# Altium PCB MP1584.PcbDoc
Units mil, origin at the board's own origin, x right, y up, seen from the top; angles counter-clockwise.
Board outline 948.82 x 673.23 mil, 2 copper layers (Top, Bottom), stack 2.8 mil thick; 28 components, 10 nets, 51 pads, 33 vias.
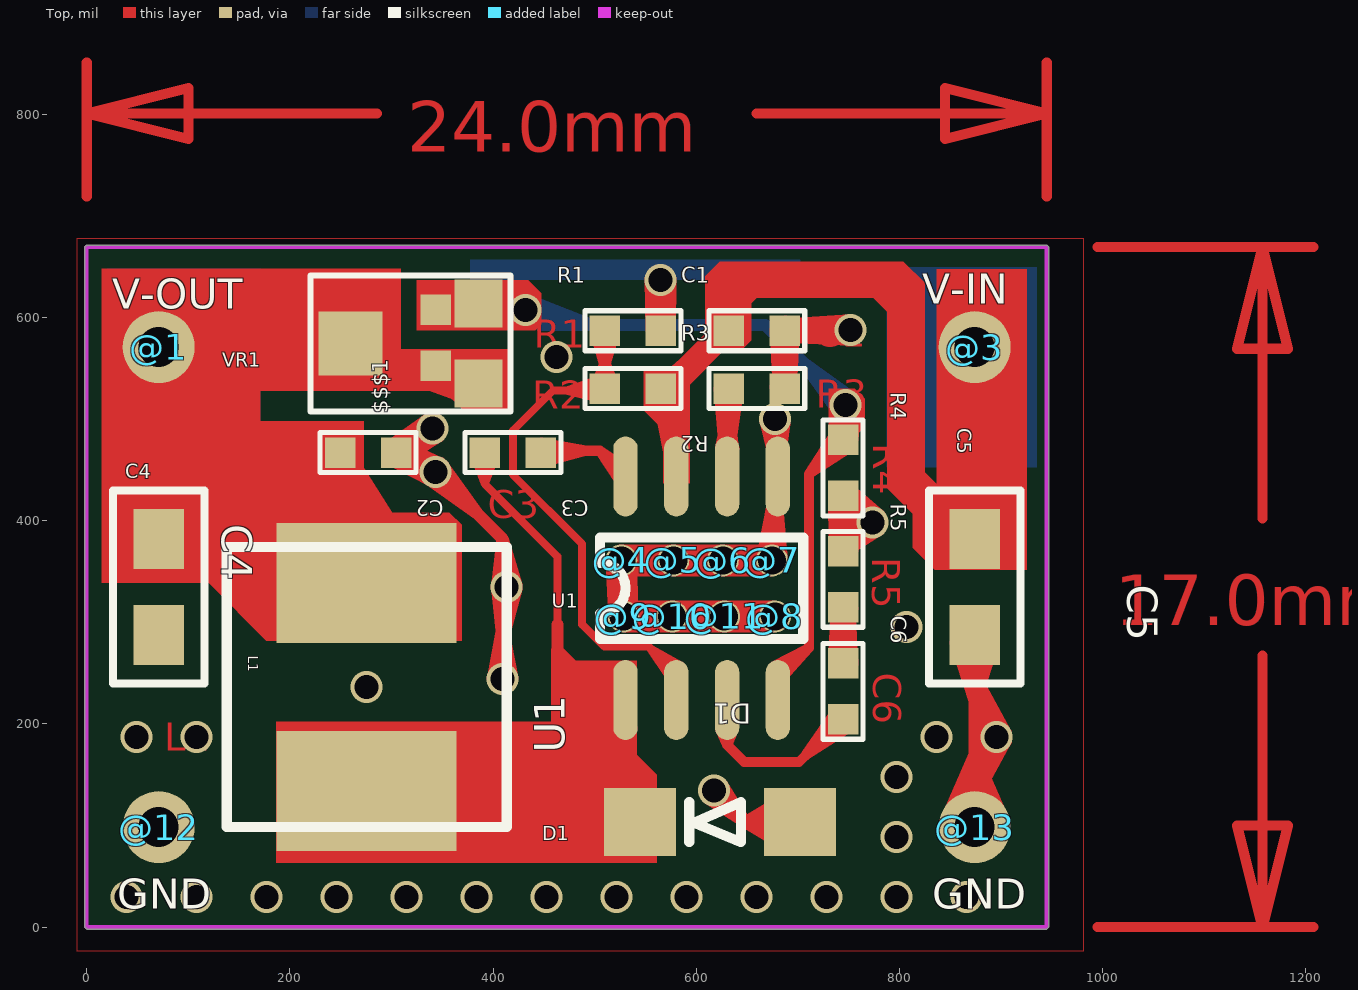
[diagram p0: Top view]
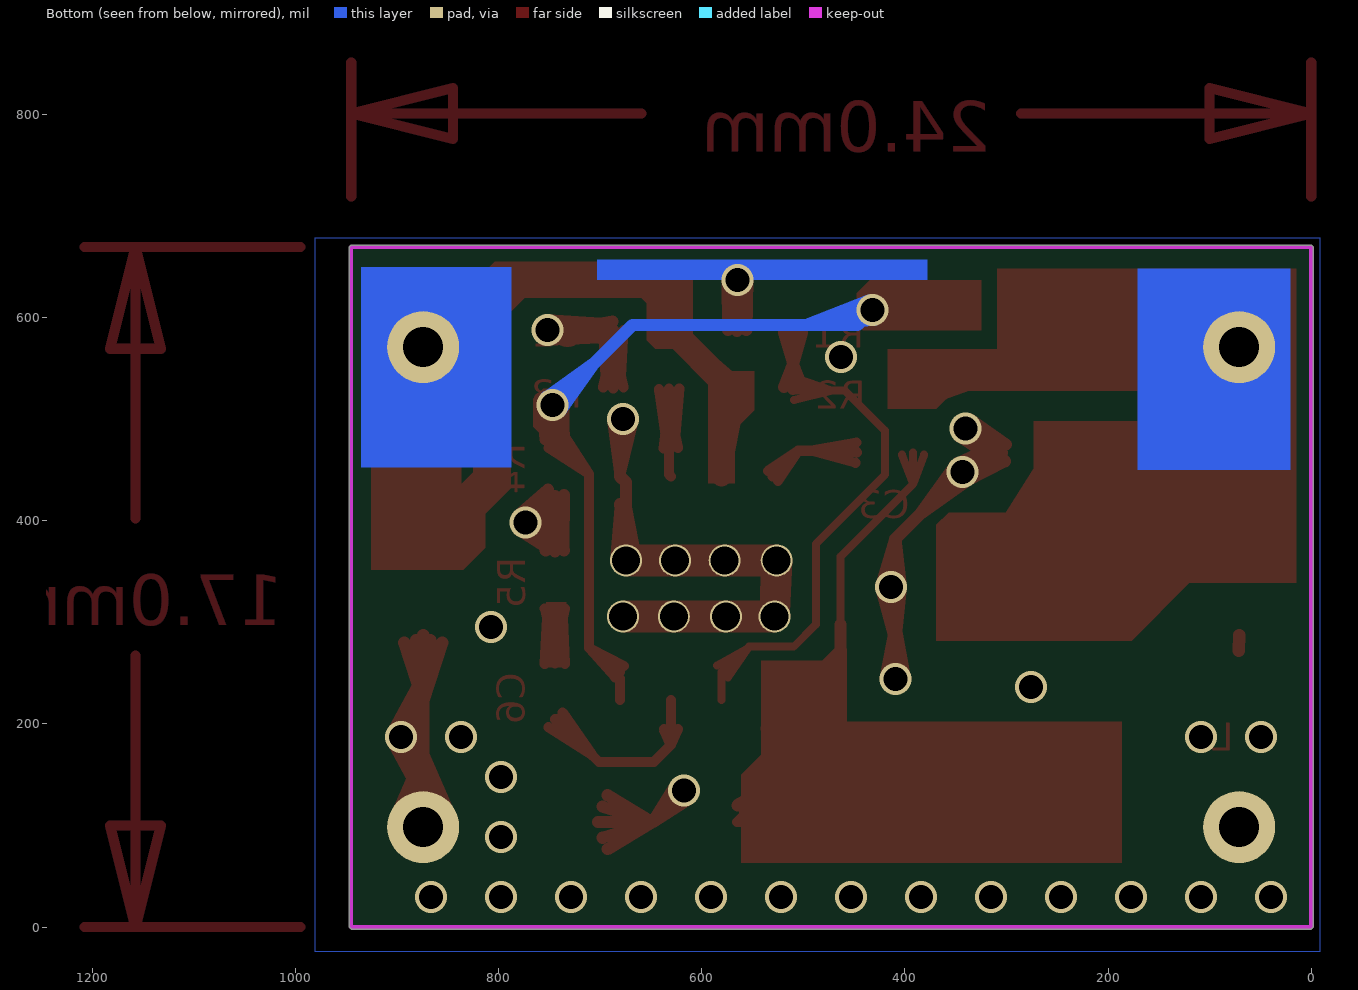
[diagram p1: Bottom view, seen from below]

## Layer stack, top to bottom
Top: signal copper 1.4
Bottom: signal copper 1.4

## Board outline
-1.97,0 0,-1.97 944.88,-1.97 946.85,0 946.85,669.29 944.88,671.26 0,671.26 -1.97,669.29

## Design rules (kind name [scope] priority, off if disabled: settings)
Clearance "'Default' PADS rule_18" [All] p1: gap=12
Clearance "'Default' PADS rule_15" [IsVia vs IsVia] p2: gap=7.87
ComponentClearance "'Default' PADS rule_12" [All] p1: gap=10 collisioncheckmode=3 verticalgap=10 showdistances=FALSE
FlightTimeFalling "'Default' PADS rule_10" [All] p1: maximum=10.00
FlightTimeRising "'Default' PADS rule_9" [All] p1: maximum=10.00
Length "'Default' PADS rule_5" [All] p1: maxlimit=50000 minlimit=0
MatchedLengths "'Default' PADS rule_11" [InNetClass('All Nets')] p1: tolerance=200 checknetsindiffpair=TRUE checkdiffpairvsdiffpair=TRUE checkothers=TRUE
MaxMinImpedance "'Default' PADS rule_8" [All] p1: minimum=50.00 maximum=150.0
ParallelSegment "'Default' PADS rule_7" [All] p1: limit=1000 gap=200
ParallelSegment "'Default' PADS rule_6" [All] p2: limit=1000 gap=200
PlaneClearance "'Default' PADS rule_14" [All] p1: clearance=12
PlaneConnect "Power Plane Connect Style - from global settings" [All] p1: planeconnectstyle=Relief reliefexpansion=20 reliefentries=2 reliefconductorwidth=19.69 reliefairgap=10
PolygonConnect [All] p1: connectstyle=Relief reliefconductorwidth=10 reliefentries=4 polygonreliefangle="90 Angle"
RoutingLayers "'Default' PADS rule_3" [All] p1: top layer_v5=TRUE bottom layer_v5=TRUE
RoutingPriority "'Default' PADS rule_2" [All] p1: routingpriority=0
RoutingTopology "'Default' PADS rule" [All] p1: topology=Shortest
RoutingVias "'Default' PADS rule_4" [All] p1: holewidth=23.62 width=31.5 viastyle="Through Hole" minholewidth=23.62 minwidth=31.5 maxholewidth=23.62 maxwidth=31.5
SMDToCorner "'Default' PADS rule_16" [All] p1: distance=78700
SMDToPlane "'Default' PADS rule_17" [All] p1: distance=78700
SilkscreenOverComponentPads [All] p1: minsilkscreentomaskgap=10
SolderMaskExpansion "Solder Mask Expansion from CAM settings" [All] p1: expansion=5
Width "'Default' PADS rule_13" [All] p1: maxlimit=196.85 minlimit=7.87 preferedwidth=12
21 further rules are at their usual default settings.

## Components (designator, comment, footprint, x,y, rotation, side; value= is the part's Value field where it differs from the comment)
$$$1 "0603/10" 0603/10 343.31,552.61 r90 top
@1 "FPAD_7" FPAD_7 70.87,570.87 r0 top
@3 "FPAD_7" FPAD_7 874.02,570.87 r0 top
@4 "FPAD_4" FPAD_4 526.1,360.91 r180 top
@5 "FPAD_4" FPAD_4 577.35,360.91 r180 top
@6 "FPAD_4" FPAD_4 626.1,360.91 r180 top
@7 "FPAD_4" FPAD_4 674.43,360.91 r180 top
@8 "FPAD_4" FPAD_4 677.35,305.73 r180 top
@9 "FPAD_4" FPAD_4 528.18,305.73 r180 top
@10 "FPAD_4" FPAD_4 576.1,305.73 r180 top
@11 "FPAD_4" FPAD_4 627.35,305.73 r180 top
@12 "FPAD_7" FPAD_7 70.87,98.43 r0 top
@13 "FPAD_7" FPAD_7 874.02,98.43 r0 top
C1 "0603A" 0603A 631.97,586.98 r0 top
C2 "0603A" 0603A 304.43,466.98 r180 top
C3 "0603A" 0603A 446.93,466.98 r180 top
C4 "0805-1A" 0805-1A 70.87,334.65 r270 top
C5 "0805-1A" 0805-1A 874.02,334.65 r270 top
C6 "0603A" 0603A 744.43,259.57 r270 top
D1 "DIODE-SMA/DO-214AC-M4" DIODE-SMA/DO-214AC-M4 623.18,103.31 r180 top
L1 "DIODE-SMA/DO-214AC-M4BAA" DIODE-SMA/DO-214AC-M4BAA 275.59,236.25 r270 top
R1 "0603A" 0603A 510.04,586.98 r0 top
R2 "0603A" 0603A 565.04,529.97 r180 top
R3 "0603A" 0603A 631.97,529.97 r0 top
R4 "0603A" 0603A 744.43,479.48 r270 top
R5 "0603A" 0603A 744.43,369.8 r270 top
U1 "SO-8" SO-8 530.27,223.64 r90 top
VR1 "R3X3AA" R3X3AA 322.52,574.38 r90 top

## Footprints (in the part's own frame and the unit in brackets; to place one, negate y for a bottom-side part, rotate by r counter-clockwise, add the part's x,y. Pads: shape width x height; smd on the part's side, far side on the other; paste and mask are expansions set on the pad)
0603/10 [mil]
  rect 30x30 smd: 1(0,0) 2(55,0)
0603A [mil]
  rect 30x30 smd: 23(0,0) 24(55,0)
  silkscreen extent -20,-20 75,20
0805-1A [mm]
  rect 1.5x1.27 smd: 1(-1.2,0) 2(1.2,0)
  silkscreen extent -2.41,-1.14 2.41,1.14
DIODE-SMA/DO-214AC-M4 [mm]
  rect 1.8x1.7 smd: 1(-2,0) 2(2,0)
  silkscreen extent -0.52,-0.5 0.77,0.5
DIODE-SMA/DO-214AC-M4BAA [mm]
  rect 3x4.5 smd: 1(-2.6,0) 2(2.6,0)
  silkscreen extent -3.5,-3.5 3.5,3.5
FPAD_4 [mm]
  round 0.8 hole 0.7: 1(0,0)
FPAD_7 [mm]
  round 1.8 hole 1: 1(0,0)
R3X3AA [mm]
  rect 1.2x1.2 smd: B1(-1,-1.6) E2(1,-1.6)
  rect 1.6x1.6 smd: C3(0,1.6)
  silkscreen extent -1.7,-2.4 1.7,2.6
SO-8 [mil]
  oval 78.74x24 smd: 1(0,0) 2(0,-50) 3(0,-100) 4(0,-150) 5(220,-150) 6(220,-100) 7(220,-50) 8(220,0)
  silkscreen extent 60,-175 160,25

## Via types
v1: diameter 31.5, hole 23.62, Top to Bottom, 33 vias

## Nets (pads, with @x,y where several pads share a name; then routed paths per layer and width w, separated by ;. In a path a pad name is that pad's centre, name@x,y a point inside that pad or via, vN(x,y) a via of type N, cw(c..) or ccw(c..) an arc to the next point about the centre after c; other vN are vias at no path point)
5V: $$$1.1 @1.1 C2.24 C4.1 L1.1 VR1.B1 VR1.C3 | length 6125.8
  Top w10: VR1.C3@248.03,550.51 310.71,535.01 ; VR1.C3@251.23,560.12 310.71,535.01 ; VR1.C3@255.84,569.04 310.71,535.01 ; VR1.C3@263.75,579.32 310.71,535.01 ; VR1.C3@271.18,586.06 310.71,535.01 ; VR1.C3@279.65,591.62 310.71,535.01 ; $$$1.1@337.26,544.65 VR1.B1@382.28,516.67 ; $$$1.1@337.42,560.68 310.71,535.01 ; $$$1.1@338.87,543.65 VR1.B1@384.82,526.41 ; $$$1.1@342.36,542.65 VR1.B1@384.82,543.6 ; $$$1.1@344.41,562.55 VR1.B1@382.28,553.35 ; $$$1.1@344.78,542.71 VR1.B1@382.28,553.35 ; $$$1.1@346.57,562.06 VR1.B1@384.82,543.6 ; $$$1.1@346.83,543.25 310.71,535.01 ; $$$1.1@349.48,560.48 VR1.B1@384.82,526.41 ; $$$1.1@350.75,559.28 VR1.B1@382.28,516.67 ; 310.71,535.01 VR1.B1 ; 310.71,535.01 271.34,574.38 VR1.C3 310.71,535.01 ; 310.71,535.01 $$$1.1 ; 331.89,535.01 VR1.B1@382.28,516.67 ; 331.89,535.01 VR1.B1@382.28,553.35 ; 331.89,535.01 VR1.B1@384.82,526.41 ; 331.89,535.01 VR1.B1@384.82,543.6 ; 331.89,535.01 VR1.B1 ; 331.89,535.01 $$$1.1@350.16,545.32 ; 331.89,535.01 $$$1.1@333.87,555.89 ; 331.89,535.01 $$$1.1 ; 331.89,535.01 $$$1.1@350.16,545.32 ; 331.89,535.01 $$$1.1@333.87,555.89 ; 331.89,535.01 $$$1.1 ; 331.89,535.01 $$$1.1@350.16,545.32 ; 331.89,535.01 $$$1.1@333.87,555.89 ; 331.89,535.01 $$$1.1 ; 331.89,535.01 $$$1.1@350.16,545.32 ; 331.89,535.01 $$$1.1@333.87,555.89 ; 331.89,535.01 $$$1.1 ; 331.89,535.01 $$$1.1@350.16,545.32 ; 331.89,535.01 $$$1.1@333.87,555.89 ; 331.89,535.01 $$$1.1 ; $$$1.1 VR1.B1 ; $$$1.1 VR1.B1@382.28,516.67 ; $$$1.1 VR1.B1@384.82,526.41 ; $$$1.1 VR1.B1 ; $$$1.1 VR1.B1@382.28,553.35 ; $$$1.1 VR1.B1@384.82,543.6 ; VR1.B1 348.15,561.36 VR1.B1 ; VR1.B1 340.5,543.01 VR1.B1
  Top w12: 42.06,564.8 70.87,499.43 ; C4.1@52.1,389.38 70.87,447.42 ; 53.56,568.74 70.87,499.43 ; C4.1@63.88,386.82 70.87,447.42 ; C4.1@64.85,359.34 132.86,346.64 ; C4.1@68.08,370.94 132.86,346.64 ; C4.1@70.87,377.36 132.86,346.64 ; C4.1 C4.1@70.87,386.12 ; C4.1@70.87,386.42 70.87,447.42 ; 72.99,553.56 142.3,570.87 ; 72.99,588.17 142.3,570.87 ; C4.1@74.29,383.47 132.86,346.64 ; 76.93,542.06 142.3,570.87 ; 76.93,599.67 142.3,570.87 ; C4.1@77.85,386.82 70.87,447.42 ; C4.1@81.56,393.07 132.86,346.64 ; 88.17,568.74 70.87,499.43 ; C4.1@89.63,389.38 70.87,447.42 ; 99.67,564.8 70.87,499.43 ; L1.1@231.26,287.67 151.01,338.62 ; L1.1@231.26,389.56 151.01,338.62 ; L1.1@237.2,298.53 151.01,338.62 ; L1.1@237.2,378.7 151.01,338.62 ; L1.1@241.62,309.9 151.01,338.62 ; L1.1@241.62,367.33 151.01,338.62 ; L1.1@244.53,321.63 151.01,338.62 ; L1.1@244.53,355.6 151.01,338.62 ; L1.1@246.06,338.62 151.01,338.62 ; VR1.C3@253.44,599.13 191.92,570.87 ; VR1.C3@256.04,549.12 191.92,570.87 ; VR1.C3@257.49,587.72 191.92,570.87 ; VR1.C3@258.89,560.9 191.92,570.87 ; L1.1 140.88,338.62 93.38,386.12 C4.1@70.87,386.12 ; C4.1@70.87,386.12 70.87,570.87 263.9,570.87 VR1.C3 191.92,570.87
  Top w23.62: L1.1@228.36,337.69 C2.24 ; L1.1@235.59,382.03 C2.24 ; L1.1@249.43,381.11 C2.24 ; L1.1@252.11,336.01 C2.24 ; L1.1@298.22,345.4 C2.24 ; L1.1@319.42,356.24 C2.24 ; C2.24 249.43,339.98 255.8,346.34 L1.1 C2.24
24V: @3.1 C1.23 C5.1 R2.23 U1.7 | length 2355.6
  Top w12: C1.23@623.06,588.2 631.97,620.11 ; C1.23@629.61,586.19 C1.23@629.61,600.12 ; C1.23 631.97,620.11 ; C1.23@640.89,588.2 631.97,620.11 ; 845.21,564.8 874.02,499.43 ; C5.1@855.25,389.38 874.02,447.42 ; 856.71,568.74 874.02,499.43 ; C5.1@859.39,374.28 823.56,432.35 ; C5.1@867.03,386.82 874.02,447.42 ; C5.1@869.04,381.49 823.56,432.35 ; 874.02,570.87 C5.1 814.9,441 814.9,610.24 787.4,637.75 649.61,637.75 631.97,620.11 ; C5.1@878.46,391.83 823.56,432.35 ; C5.1@881,386.82 874.02,447.42 ; C5.1@884.72,402.11 823.56,432.35 ; 891.32,568.74 874.02,499.43 ; C5.1@892.78,389.38 874.02,447.42 ; 902.82,564.8 874.02,499.43 ; 823.56,432.35 874.02,386.42 874.02,447.42
  Top w19.68: R2.23@571.95,535.95 C1.23 R2.23@574.49,535.01 ; U1.7 580.27,531.07 ; U1.7@580.27,451.34 R2.23 ; C1.23@624.92,581.83 R2.23 ; C1.23@629.61,586.19 R2.23@574.49,535.01 ; R2.23 574.97,529.97 R2.23@574.49,535.01 ; R2.23 580.27,531.07 ; R2.23 580.27,531.07 ; R2.23 580.27,531.07 ; R2.23 580.27,471.01 580.27,531.07 ; R2.23@574.49,535.01 580.27,531.07
$$$158: C6.24 U1.3 | length 386.8
  Top w10: U1.3@623.42,194.83 630.27,179.23 ; U1.3@630.27,196.27 630.27,179.23 ; U1.3 630.27,179.23 ; U1.3@637.12,194.83 630.27,179.23 ; C6.24@736.82,211.05 707.79,169.22 ; C6.24@750.64,196.72 707.79,169.22 ; 630.27,179.23 647.01,162.49 701.06,162.49 743.14,204.57 C6.24 707.79,169.22
$$$174: C6.23 R5.24 | length 508.5
  Top w10: C6.23@734.45,258.94 R5.24@736.59,304.43 ; C6.23@734.5,260.68 744.43,304.57 C6.23@754.37,260.68 ; R5.24@734.5,313.69 744.43,269.8 R5.24@754.37,313.69 ; C6.23@734.83,262.36 R5.24@752.27,304.43 ; R5.24 C6.23 ; C6.23@754.04,262.36 R5.24@736.59,304.43 ; C6.23@754.41,258.94 R5.24@752.27,304.43 ; R5.24@736.59,304.43 C6.23 ; C6.23 R5.24@752.27,304.43
$$$182: $$$1.2 R4.23 U1.4 VR1.E2 | length 2410
  Top w10: U1.4@676.5,256.91 709.98,274.17 ; U1.4 680.27,244.46 710.71,274.9 710.71,445.75 ; U1.4@680.27,251.01 709.98,274.17 ; U1.4@685.06,245.91 709.98,274.17 ; R4.23@736.66,485.77 710.71,445.75 ; R4.23@750.72,471.7 710.71,445.75 ; 710.71,445.75 743.78,478.83 R4.23 710.71,445.75
  Top w12: v1@426.3,599.48 VR1.E2@389.27,630.97 ; v1@428.38,616.61 VR1.E2@389.27,596.53 ; v1@433.21,597.85 VR1.E2@389.27,596.53 ; v1@435.67,616.47 VR1.E2@389.27,630.97 ; v1@737.08,513.29 R4.23 ; v1@737.17,512.52 R4.23@746.8,481.84 ; v1@737.23,515.82 R4.23@735.61,481.25 ; v1@737.59,510.8 R4.23@753.42,480.03 ; R4.23@743.78,478.83 R4.23@746.8,481.84 ; v1@755.49,509.58 R4.23@735.61,481.25 ; v1@756.34,511.97 R4.23 ; v1@756.44,512.52 R4.23@746.8,481.84 ; v1@756.54,514.49 R4.23@753.42,480.03 ; VR1.E2 v1@426.92,613.75 ; VR1.E2 v1@426.92,613.75 ; VR1.E2 429.54,598.03 VR1.E2 ; VR1.E2 432.13,617.24 VR1.E2 ; VR1.E2 v1(431.84,607.5) ; VR1.E2 v1(431.84,607.5) ; VR1.E2@389.27,596.53 v1@426.92,613.75 ; VR1.E2@389.27,596.53 v1(431.84,607.5) ; VR1.E2@389.27,630.97 v1@426.92,613.75 ; VR1.E2@389.27,630.97 v1(431.84,607.5) ; v1@426.92,613.75 431.84,608.83 v1(431.84,607.5) ; R4.23@735.61,481.25 v1(746.8,514) ; R4.23 v1(746.8,514) ; R4.23@746.8,481.84 v1(746.8,514) ; v1(746.8,514) R4.23@753.42,480.03
  Bottom w12: v1@430.37,597.86 496.42,592.74 ; v1@434.71,616.82 496.42,592.74 ; v1@739.36,507.7 705.6,555.2 ; v1@753.09,521.44 705.6,555.2 ; 496.42,592.74 v1(431.84,607.5) 446.61,592.74 668.06,592.74 v1(746.8,514) 705.6,555.2
$$$183: R3.23 U1.6 | length 908.8
  Top w10: R3.23@622.01,529.11 630.83,484.95 ; R3.23@621.98,530.18 626,484.64 ; R3.23@622.04,528.86 631.97,484.97 ; R3.23@622.15,528.08 635.55,484.82 ; U1.6@623.32,471.88 631.97,513.02 ; U1.6 631.97,445.35 R3.23 ; U1.6@630.27,471.01 631.97,513.02 ; U1.6@637.26,471.31 631.97,513.02 ; R3.23@641.69,527.59 626,484.64 ; R3.23@641.88,528.61 630.83,484.95 ; R3.23@641.91,528.86 631.97,484.97 ; R3.23@641.97,529.65 635.55,484.82 ; R3.23@622.42,527.02 631.97,513.02 ; R3.23@622.42,527.02 631.97,513.02 ; R3.23@622.42,527.02 631.97,513.02 ; 626,484.64 R3.23 ; 630.83,484.95 R3.23 ; 631.97,484.97 R3.23 ; 631.97,513.02 R3.23@641.53,527.02 ; 631.97,513.02 R3.23 ; 631.97,513.02 R3.23@641.53,527.02 ; 631.97,513.02 R3.23 ; 631.97,513.02 R3.23@641.53,527.02 ; 631.97,513.02 R3.23 ; R3.23 635.55,484.82
$$$191: R1.23 R2.24 U1.2 | length 887.6
  Top w7.87: R2.24@507.89,540.82 471.34,527.92 ; R2.24@509.05,518.95 471.34,527.92 ; R1.23@509.86,584.27 R1.23 ; U1.2@574.16,245.75 554.95,274.23 ; U1.2 580.27,248.92 553.23,275.95 509.4,275.95 487.35,298 487.35,377.27 419.38,445.24 419.38,488.55 458.75,527.92 508,527.92 R2.24 471.34,527.92 ; U1.2@580.27,251.01 554.95,274.23 ; U1.2@584.98,257.55 554.95,274.23
  Top w12: R1.23@501.12,585.78 509.86,554.44 ; R2.24@501.2,531.64 510.04,554.25 ; R1.23@509.86,584.27 509.86,554.44 ; R2.24 510.04,554.25 ; R1.23 509.86,554.44 ; R2.24@518.89,531.64 510.04,554.25 ; R1.23@518.95,585.68 509.86,554.44 ; 509.86,554.44 510.04,554.25
$$$201: C3.24 D1.2 L1.2 U1.1 | length 4570.2
  Top w7.87: C3.24@381.05,465 391.93,435.98 ; C3.24 391.93,435.98 ; C3.24@402.82,465 391.93,435.98 ; 463.35,297.98 463.35,364.56 391.93,435.98
  Top w10: D1.2@514.04,104.81 530.27,142.32 ; U1.1@523.29,195.69 530.27,154.27 ; D1.2@524.06,101.92 530.27,142.32 ; U1.1@530.27,196.27 530.27,154.27 ; U1.1 530.27,142.32 ; D1.2@534.17,101.64 530.27,142.32 ; U1.1@537.24,195.69 530.27,154.27 ; D1.2 565.24,103.31 530.27,138.29 ; D1.2@550.24,106.66 530.27,142.32 ; D1.2@558.39,112.66 530.27,142.32 ; D1.2@564.98,120.74 530.27,142.32 ; 530.27,138.29 530.27,142.32 ; 530.27,138.29 514.05,104.98 530.27,138.29 ; 530.27,138.29 563.68,122.3 530.27,138.29 ; 530.27,138.29 524.07,101.77 530.27,138.29 ; 530.27,138.29 557.84,113.55 530.27,138.29 ; 530.27,138.29 534.21,101.46 530.27,138.29 ; 530.27,138.29 550.09,107 530.27,138.29 ; 530.27,138.29 D1.2@542.47,103.31 ; 530.27,138.29 D1.2@542.47,103.31 ; 530.27,142.32 D1.2@542.47,103.31
  Top w12: L1.2@305.12,133.89 400.16,137.68 ; L1.2@305.97,150.93 400.16,137.68 ; L1.2@307.32,116.98 400.16,137.68 ; L1.2@308.41,162.76 400.16,137.68 ; L1.2@310.7,105.38 400.16,137.68 ; L1.2@312.38,174.3 400.16,137.68 ; L1.2@315.57,94.19 400.16,137.68 ; L1.2@317.88,185.39 400.16,137.68 ; L1.2@321.93,83.57 400.16,137.68 ; 463.35,297.98 463.35,253.64 493.35,223.64 ; D1.2@515.03,104.4 530.27,142.32 ; D1.2@527.1,101.57 530.27,142.32 ; D1.2@537.95,76.22 L1.2 ; D1.2@540.27,88.01 L1.2 ; D1.2@543.79,118.72 L1.2 ; D1.2@544.2,130.72 L1.2 ; D1.2@556.09,110.64 530.27,142.32 ; D1.2@564.4,119.84 530.27,142.32 ; L1.2 529.56,141.61 ; L1.2 D1.2@542.47,103.31 ; 493.35,223.64 U1.1 493.35,223.64 ; 529.56,141.61 530.27,142.32 ; 529.56,141.61 515.01,103.91 529.56,141.61 ; 529.56,141.61 563.97,120.41 529.56,141.61 ; 529.56,141.61 527.14,101.27 529.56,141.61 ; 529.56,141.61 555.91,110.97 529.56,141.61 ; 529.56,141.61 D1.2@542.47,103.31 ; 529.56,141.61 D1.2@542.47,103.31 ; 530.27,142.32 D1.2@542.47,103.31
$$$202: C3.23 U1.8 | length 336.9
  Top w10: C3.23@447.62,476.95 492.01,468.87 ; C3.23@448.46,457.09 492.01,468.87 ; U1.8@524.86,439.2 505.04,468.87 ; U1.8@534.71,449.05 505.04,468.87 ; 492.01,468.87 C3.23 448.82,468.87 505.04,468.87 ; 505.04,468.87 U1.8 505.04,468.87
GND: @4.1 @5.1 @6.1 @7.1 @8.1 @9.1 @10.1 @11.1 @12.1 @13.1 C1.24 C2.23 C4.2 C5.2 D1.1 R1.24 R3.24 R4.24 R5.23 U1.5 | length 11490.9
  Top w10: C1.24@676.99,587.53 R3.24@679.46,541.8 ; R3.24@677.04,531.08 686.97,574.97 R3.24@696.91,531.08 ; C1.24@677.04,585.86 R3.24@686.97,541.98 ; C1.24@677.35,584.27 R3.24@694.48,541.8 ; R3.24 C1.24 ; C1.24@696.6,584.27 R3.24@679.46,541.8 ; C1.24@696.91,585.86 R3.24@686.97,541.98 ; C1.24@696.96,587.53 R3.24@694.48,541.8 ; R3.24@679.46,541.8 C1.24 ; R3.24@686.97,541.98 C1.24 ; C1.24 R3.24@694.48,541.8
  Top w12: C4.2 C4.2@71.42,272.05 ; v1@332.55,496.71 C2.23@310.17,460.04 ; v1@333.97,498.18 C2.23 ; v1@335.66,499.32 C2.23@300.27,474.96 ; v1@336.16,441.39 C2.23@319.35,466.98 ; v1@336.53,441.01 C2.23@309.2,474.61 ; v1@337.06,440.53 384.55,406.77 v1@350.8,454.27 ; v1@338.11,439.75 C2.23 ; v1@339.93,438.85 C2.23@301.35,458.52 ; v1@342.76,481.3 C2.23@300.27,474.96 ; v1@344.64,457.64 C2.23@301.35,458.52 ; v1@344.67,482.03 C2.23 ; v1@346.38,483.15 C2.23@310.17,460.04 ; v1@346.61,457.16 C2.23 ; v1@348.11,456.48 C2.23@319.35,466.98 ; v1@348.44,456.29 C2.23@309.2,474.61 ; v1@399.65,244.89 409.35,295.72 v1@419.05,244.89 ; v1@403.64,334.49 409.35,282.55 ; v1@403.64,334.82 409.35,381.98 ; v1(409.35,243.98) 409.35,381.98 ; v1@422.96,336.47 409.35,381.98 ; v1@422.99,332.99 409.35,282.55 ; 516.36,361.35 518.93,309.5 ; 516.4,359.99 526.1,309.16 ; 516.44,359.63 528.04,309.19 ; 516.81,357.96 537.16,309.97 ; 518.45,306.25 526.1,357.55 ; 525.17,351.21 576.42,351.21 ; 525.17,370.62 576.42,370.62 ; 528.85,351.56 576.42,370.62 ; 528.85,370.27 576.42,351.21 ; 535.59,358.67 518.93,309.5 ; 535.8,359.99 526.1,309.16 ; 535.78,362.08 537.16,309.97 ; 535.83,360.36 528.04,309.19 ; 537.84,307.03 526.1,357.55 ; v1@555,637.77 R1.24@556.08,587.78 ; v1@555.02,636.01 R1.24 ; v1@555.36,634.3 R1.24@574.01,587.78 ; 573.17,296.43 529.18,315.42 ; 573.17,315.02 529.18,296.03 ; v1@574.11,634.42 R1.24@556.08,587.78 ; v1@574.42,636.14 R1.24 ; v1@574.43,637.89 R1.24@574.01,587.78 ; 575.11,296.03 528.18,305.73 ; 575.11,315.42 528.18,305.73 ; 575.17,296.02 626.42,296.02 ; 575.17,315.43 626.42,315.43 ; 576.38,351.21 625.13,351.21 ; 576.38,370.61 625.13,370.61 ; 577.03,296.02 627.35,305.73 ; 577.03,315.43 627.35,305.73 ; 577.09,296.03 529.18,296.03 ; 577.09,315.42 529.18,315.42 ; 578.85,296.37 626.42,315.43 ; 578.85,315.08 626.42,296.02 ; 580.24,351.6 625.13,370.61 ; 580.24,370.22 625.13,351.21 ; v1@611.34,126.64 648.36,103.31 ; v1(617.42,134.25) 648.36,103.31 ; v1@625.04,140.34 648.36,103.31 ; 625.12,351.21 673.45,351.21 ; 625.12,370.61 673.45,370.61 ; 626.4,296.02 676.4,296.02 ; 626.4,315.43 676.4,315.43 ; 628.3,296.02 677.35,305.73 ; 628.3,315.43 677.35,305.73 ; 629.01,351.61 673.45,370.61 ; 629.01,370.22 673.45,351.21 ; 630.16,296.39 676.4,315.43 ; 630.16,315.06 676.4,296.02 ; 664.73,361.83 U1.5@674.43,412.66 ; 664.88,362.83 U1.5@679.81,412.5 ; v1@667.78,498.81 U1.5@680.27,448.34 ; v1@668.01,497.71 U1.5@680.27,471.01 ; 674.43,368.12 U1.5@680.27,416.27 ; 684.14,361.83 U1.5@674.43,412.66 ; 684.18,360.82 U1.5@679.81,412.5 ; C1.24 750.88,586.98 v1(751.72,587.81) ; v1@687.15,499.58 U1.5@680.27,471.01 ; v1@687.16,499.87 U1.5@680.27,448.34 ; C1.24@687.77,578.01 737.97,586.98 C1.24@687.77,595.94 ; D1.1@692.64,76.84 648.36,103.31 ; D1.1@692.64,129.79 648.36,103.31 ; D1.1@697.63,88.02 648.36,103.31 ; D1.1@697.63,118.6 648.36,103.31 ; D1.1@699.95,103.31 648.36,103.31 ; D1.1 648.36,103.31 ; R4.24@735.46,425.16 R5.23@736.07,373.94 ; R5.23@735.47,370.6 744.43,420.8 R5.23@753.4,370.6 ; R4.24@735.47,423.68 R5.23@744.43,373.48 ; R4.24@735.72,422.23 R5.23@752.8,373.94 ; R5.23 R4.24 ; v1@749.41,597.28 C1.24@700.03,580.2 ; v1@749.72,578.28 C1.24@699.12,593.91 ; v1@750.65,597.5 C1.24@699.96,586.98 ; v1@750.96,578.1 C1.24@699.96,586.98 ; v1@751.95,597.56 C1.24@699.12,593.91 ; v1@752.24,578.08 C1.24@700.03,580.2 ; R4.24@753.15,422.23 R5.23@736.07,373.94 ; R4.24@753.4,423.68 R5.23@744.43,373.48 ; v1@764.78,393.75 R4.24@751.2,430.41 ; v1@764.84,393.63 R4.24@753.41,425.16 ; v1@765.11,403.35 R5.23@752.8,373.94 ; v1@765.68,392.33 R4.24@747.2,424.48 ; v1@766.03,391.9 R4.24 ; v1@767.68,390.37 R4.24@739.21,417.15 ; v1@777.03,407.31 R4.24@739.21,417.15 ; v1@779.01,406.24 R4.24 ; v1@779.35,405.99 R4.24@747.2,424.48 ; v1@779.81,390.89 R5.23@752.8,373.94 ; v1@780.32,405.15 R4.24@753.41,425.16 ; v1@780.69,404.75 R4.24@751.2,430.41 ; 845.21,104.49 874.02,169.86 ; C5.2@855.25,279.92 874.02,221.87 ; 856.71,100.55 874.02,169.86 ; C5.2@867.03,282.47 874.02,221.87 ; 874.02,98.43 C5.2 ; C5.2@874.02,282.87 874.02,221.87 ; C5.2@881,282.47 874.02,221.87 ; v1@886.27,184.41 874.02,247.12 ; v1@886.28,189.62 874.02,127.24 ; 891.32,100.55 874.02,169.86 ; C5.2@892.78,279.92 874.02,221.87 ; 902.82,104.49 874.02,169.86 ; v1@904.55,182.99 874.02,127.24 ; v1@904.56,191 874.02,247.12 ; C2.23@300.27,474.96 v1(340.24,490.72) ; C2.23@300.27,474.96 v1(340.24,490.72) ; C2.23@301.35,458.52 v1(343.35,447.98) ; C2.23@301.35,458.52 v1(343.35,447.98) ; C2.23 C2.23@319.35,466.98 ; C2.23 v1(340.24,490.72) ; C2.23 v1(343.35,447.98) ; C2.23 v1(340.24,490.72) ; C2.23 v1(343.35,447.98) ; C2.23@309.2,474.61 v1(343.35,447.98) ; C2.23@309.2,474.61 v1(343.35,447.98) ; C2.23@310.17,460.04 v1(340.24,490.72) ; C2.23@310.17,460.04 v1(340.24,490.72) ; C2.23@319.35,466.98 v1(343.35,447.98) ; C2.23@319.35,466.98 v1(343.35,447.98) ; v1(343.35,447.98) 409.35,381.98 ; 409.35,282.55 v1(413.39,334.65) 409.35,381.98 ; 518.93,309.5 526.1,360.91 ; 526.1,309.16 526.1,360.91 ; 526.1,357.55 528.18,305.73 ; 526.1,360.91 577.35,360.91 ; 526.1,360.91 526.1,306.98 528.18,305.73 ; 526.1,360.91 576.42,351.21 ; 526.1,360.91 576.42,370.62 ; 526.1,360.91 577.35,360.91 ; 526.1,360.91 537.16,309.97 ; 526.1,360.91 528.04,309.19 ; 528.18,305.73 576.1,305.73 ; 528.18,305.73 576.1,305.73 ; 529.18,296.03 576.1,305.73 ; 529.18,315.42 576.1,305.73 ; 529.18,315.42 576.1,305.73 ; R1.24@556.08,587.78 v1@565.04,637.03 ; R1.24@556.08,587.78 v1(564.72,637.03) ; v1(564.72,637.03) v1@565.04,637.03 ; v1(564.72,637.03) R1.24 ; v1(564.72,637.03) R1.24@574.01,587.78 ; R1.24 v1@565.04,637.03 ; v1@565.04,637.03 R1.24@574.01,587.78 ; 576.1,305.73 627.35,305.73 ; 576.1,305.73 626.42,296.02 ; 576.1,305.73 626.42,315.43 ; 577.35,360.91 626.1,360.91 ; 577.35,360.91 625.13,351.21 ; 577.35,360.91 625.13,370.61 ; 577.35,360.91 626.1,360.91 ; 577.35,360.91 527.03,370.62 577.35,360.91 ; 577.35,360.91 527.03,351.21 577.35,360.91 ; 626.1,360.91 674.43,360.91 ; 626.1,360.91 673.45,351.21 ; 626.1,360.91 673.45,370.61 ; 626.1,360.91 674.43,360.91 ; 626.1,360.91 578.32,370.61 626.1,360.91 ; 626.1,360.91 578.32,351.21 626.1,360.91 ; 627.35,305.73 677.35,305.73 ; 627.35,305.73 676.4,296.02 ; 627.35,305.73 676.4,315.43 ; 674.43,360.91 674.43,356.98 674.43,437.81 U1.5 v1@680.27,497.41 ; 674.43,360.91 U1.5@674.43,412.66 ; 674.43,360.91 U1.5@679.81,412.5 ; 674.43,360.91 627.08,370.61 674.43,360.91 ; 674.43,360.91 627.08,351.21 674.43,360.91 ; v1(677.42,500.25) v1@680.27,497.41 ; v1(677.42,500.25) U1.5@680.27,471.01 ; v1(677.42,500.25) U1.5@680.27,448.34 ; U1.5@680.27,471.01 v1@680.27,497.41 ; C1.24@699.12,593.91 v1(751.72,587.81) ; C1.24@699.96,586.98 v1(751.72,587.81) ; C1.24@700.03,580.2 v1(751.72,587.81) ; R5.23@736.07,373.94 R4.24 ; R4.24@739.21,417.15 v1(773.42,398.25) ; R4.24@739.21,417.15 v1(773.42,398.25) ; R5.23@744.43,373.48 R4.24 ; R4.24 R4.24@747.2,424.48 ; R4.24 R5.23@752.8,373.94 ; R4.24 v1(773.42,398.25) ; R4.24@747.2,424.48 v1(773.42,398.25) ; R4.24@751.2,430.41 v1(773.42,398.25) ; R5.23@752.8,373.94 R4.24@753.41,425.16 ; R5.23@752.8,373.94 v1(773.42,398.25) ; R4.24@753.41,425.16 v1(773.42,398.25) ; 874.02,127.24 v1(895.67,187.01) 874.02,247.12
  other v1: 39.37,29.53 108.27,29.53 177.17,29.53 246.06,29.53 314.96,29.53 383.86,29.53 452.76,29.53 521.65,29.53 590.55,29.53 659.45,29.53 728.35,29.53 797.24,29.53 866.14,29.53 797.24,88.58 797.24,147.64 49.21,187.01 108.27,187.01 836.61,187.01 275.59,236.25 807.09,295.31 462.6,561.06
copper on no net: | length 2817.8
  Top w10: 0,719.29 0,850.75 ; 285.62,800.75 0,800.75 ; 659.26,800.75 944.88,800.75 ; 944.88,719.29 944.88,850.75 ; 994.88,0 1207.17,0 ; 994.88,669.29 1207.17,669.29 ; 1157.17,267.15 1157.17,0 ; 1157.17,402.15 1157.17,669.29 ; 0,800.75 100,825.75 100,775.75 0,800.75 ; 944.88,800.75 844.88,775.75 844.88,825.75 944.88,800.75 ; 1157.17,0 1132.17,100 1182.17,100 1157.17,0 ; 1157.17,669.29 1182.17,569.29 1132.17,569.29 1157.17,669.29

## Polygon pours and split planes (outlines as drawn)
GND on Top "Top-GND" (solid, remove dead copper, pour order 2): -9.12,678 980.88,678 980.88,-24 -9.12,-24
GND on Bottom "Bottom-GND" (solid, remove dead copper, pour order 4): -9.12,678 980.88,678 980.88,-24 -9.12,-24

## Keep-outs
Keep-Out Layer:
  lines w3.94: 0,0 0,669.29 944.88,669.29 944.88,0 0,0

## Other copper
Top:
  region: 324.8,636.58 434.34,636.58 447.13,623.79 447.13,593.26 441.53,587.66 324.8,587.66 324.8,636.58
  region: 541.35,261.98 481.35,261.98 469.35,273.98 457.35,273.98 457.35,177.98 541.35,177.98 541.35,261.98
  region: 757.96,484.61 765.83,492.49 765.83,520.05 755.99,529.89 730.4,529.89 730.4,484.61 757.96,484.61
  region: 541.42,201.98 186.35,201.98 186.35,63.35 561.11,63.35 561.11,149.97 541.42,169.65 541.42,201.98
  region: 393.92,630.67 429.92,630.67 441.92,618.67 441.92,606.67 429.92,594.67 393.92,594.67 393.92,630.67
  region: 14.88,648.2 308.88,648.2 308.88,568.54 416.88,568.54 416.88,510 368.88,510 350.88,528 170.88,528 170.88,498 272.88,498 272.88,408 356.88,408 368.88,396 368.88,282 176.88,282 119.88,339 14.88,339 14.88,648.2
  region: 733.27,319.88 752.95,319.88 752.95,255.91 733.27,255.91 733.27,319.88
  region: 593.31,437.04 593.31,533.89 628.54,569.13 645.67,569.13 654.23,577.69 654.23,614.21 659.6,619.57 774.1,619.57 787.92,605.75 787.92,431.92 813.05,406.79 813.05,373.26 834.68,351.64 925.2,351.64 925.2,647.67 836.61,647.67 836.61,435.86 824.61,447.87 824.61,634.29 803.84,655.05 623.23,655.05 608.71,640.54 608.71,583.89 571.88,547.06 548.03,547.06 548.03,508.69 567.32,489.4 567.32,437.04 593.31,437.04
  text "24.0mm" at 315.62,763.25 h50
  text "17.0mm" at 1011.72,297.15 h50
Bottom:
  region: 787.4,649.64 935.04,649.64 935.04,452.79 787.4,452.79 787.4,649.64
  region net GND: 377.71,656.71 702.51,656.71 702.51,637.03 377.71,637.03 377.71,656.71
  region: 20.88,648.2 170.88,648.2 170.88,450 20.88,450 20.88,648.2

## Silkscreen, mask and mechanical layers (free items; w line width, h text height)
Silkscreen Top:
  text "V-IN" at 822.52,613.75 h29.53
  text "V-OUT" at 25.28,608.83 h29.53
  text "GND" at 30.2,18.27 h29.53
  text "GND" at 832.37,18.27 h29.53
Solder Mask Top:
  region: 694.97,283.83 584.73,283.83 578.82,289.73 521.74,289.73 512.88,298.59 512.88,374.38 521.25,382.74 694.97,382.74 694.97,283.83
Solder Mask Bottom:
  region: 489.92,398.92 735.92,398.92 735.92,266.92 489.92,266.92 489.92,398.92
  region: 428.15,418.31 777.56,418.31 777.56,226.38 428.15,226.38 428.15,418.31
Assembly Drawing Top:
  region: -15560.64,10391.71 -15560.64,10436.71 -15497.64,10436.71 -15497.64,10391.71 -15560.64,10391.71